# Altium PCB ELEKID_POWER.PcbDoc
Units mil, origin at the board's own origin, x right, y up, seen from the top; angles counter-clockwise.
Board outline 2420 x 1725 mil, 2 copper layers (Top Layer, Bottom Layer); 38 components, 23 nets, 111 pads, 61 vias.
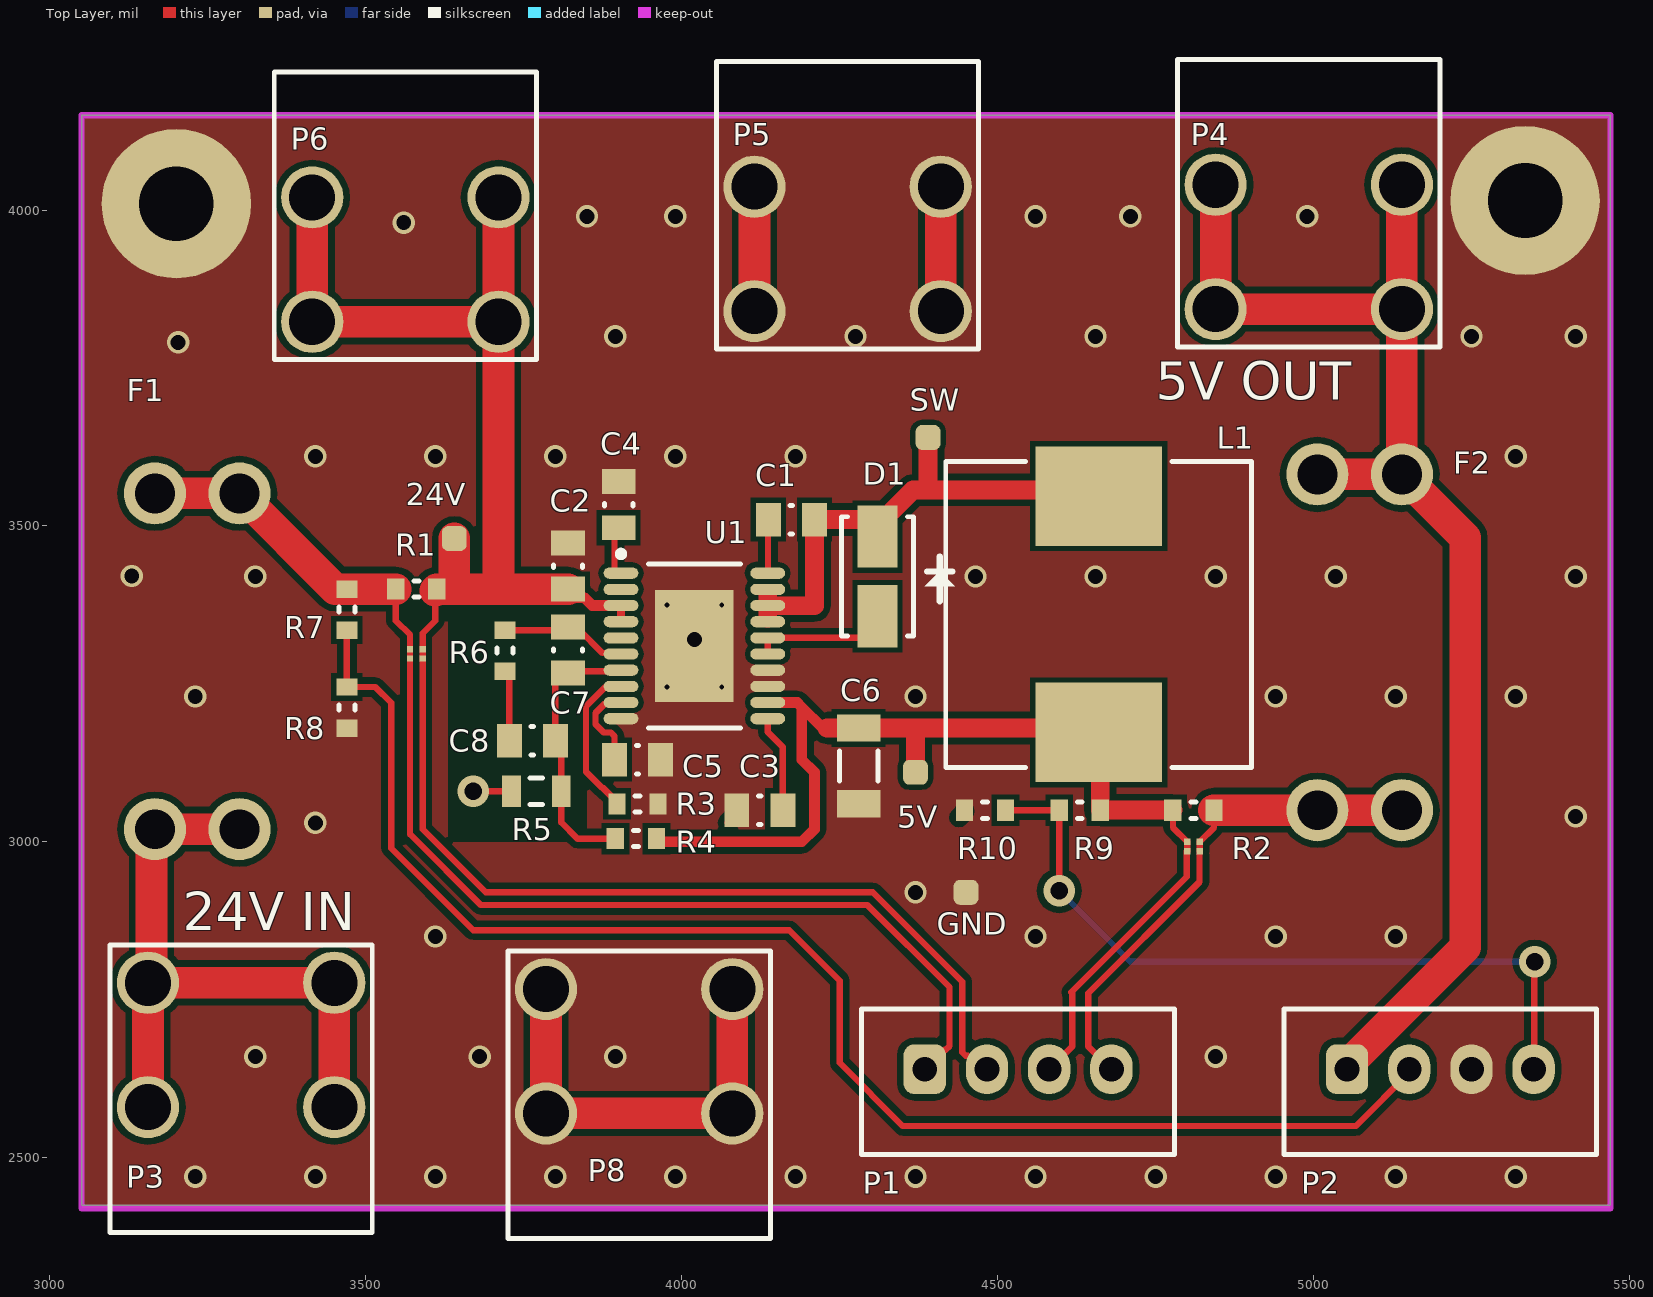
[diagram p0: Top Layer view]
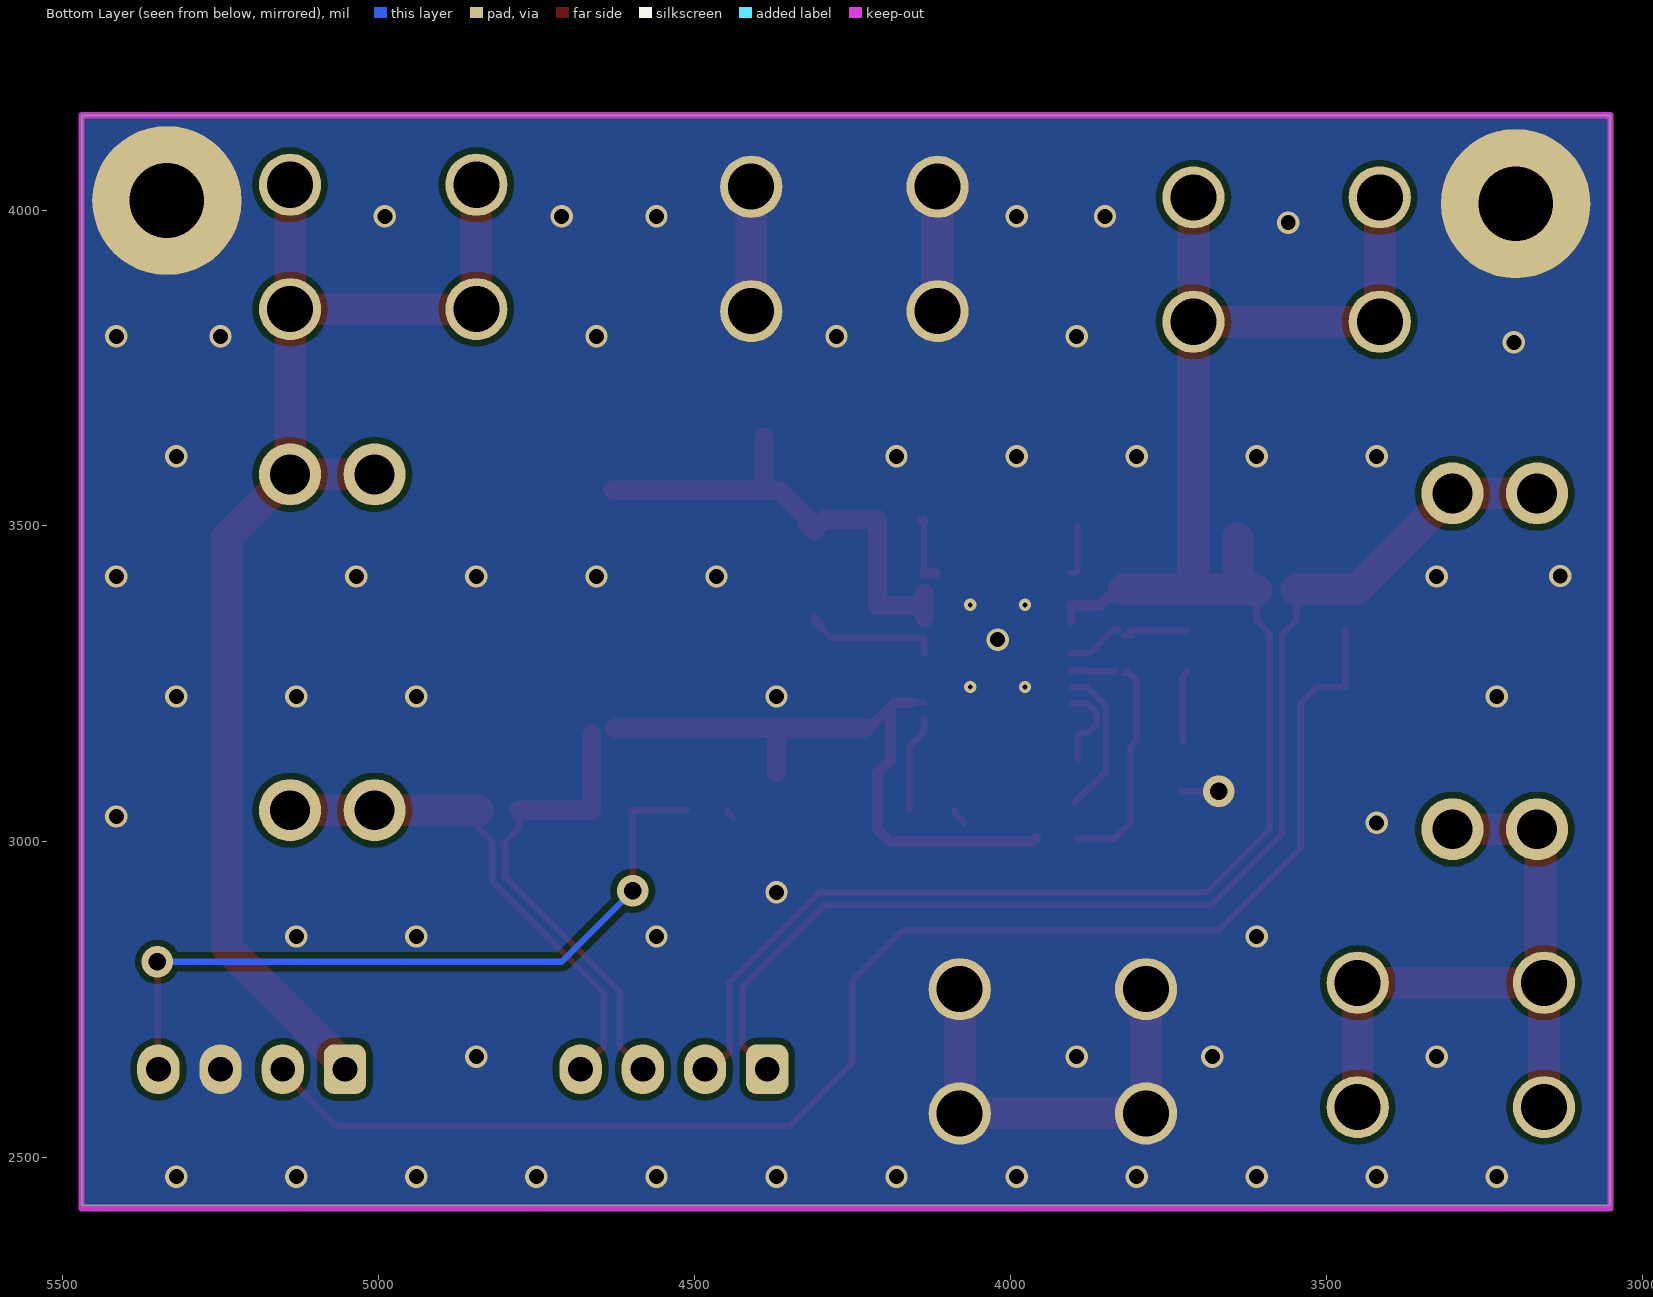
[diagram p1: Bottom Layer view, seen from below]
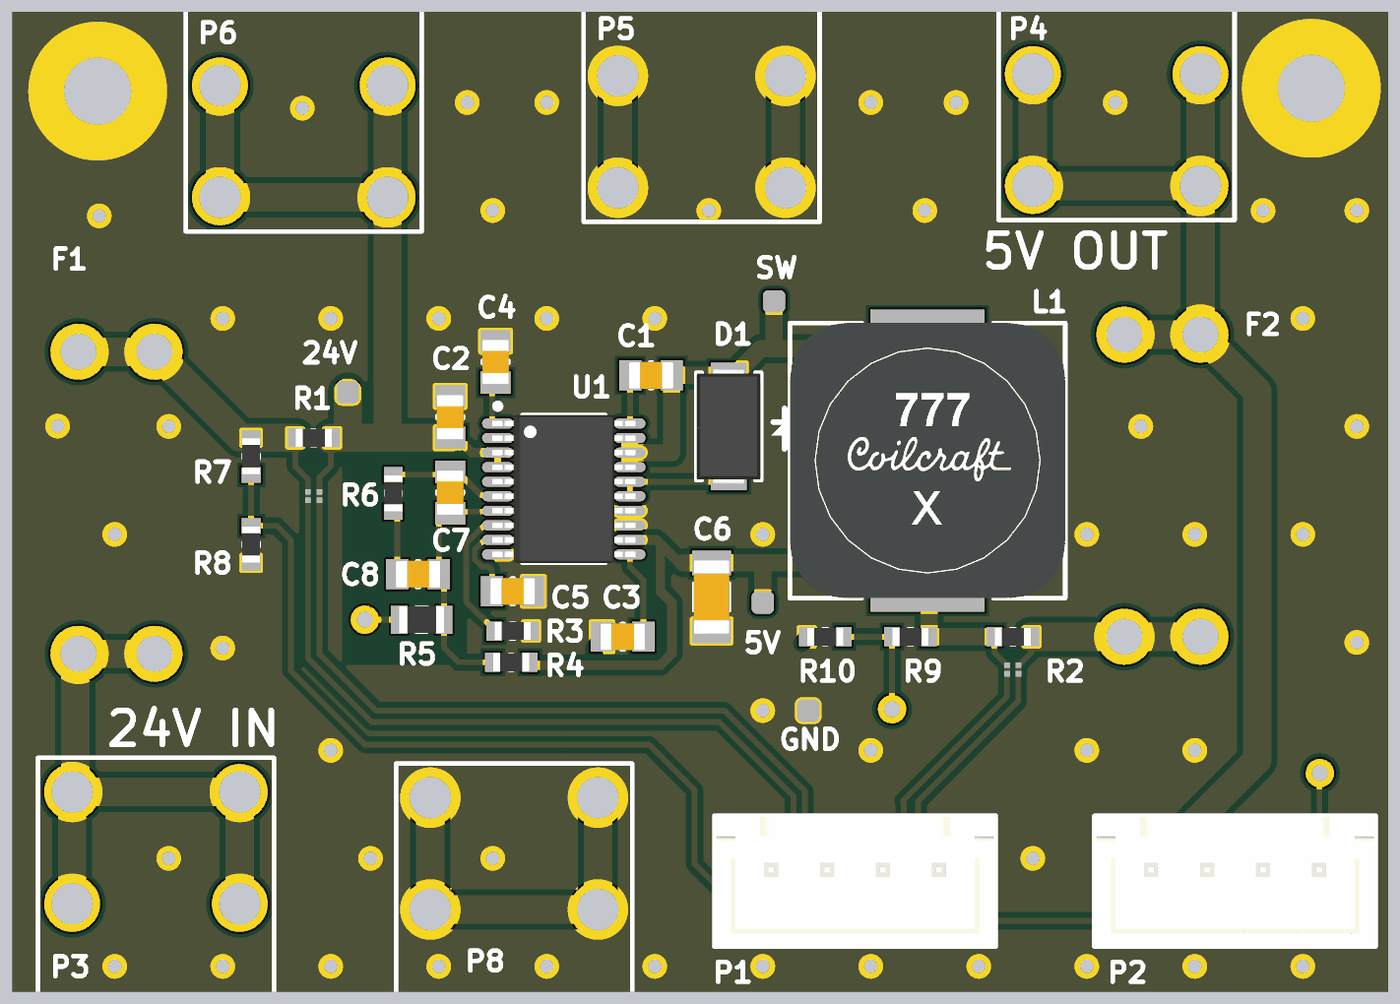
[diagram p2: 3D render of the assembled board from above, using the file's embedded part models]

## Layer stack, top to bottom
Top Solder: solder mask 0.4, Solder Resist, Dk 3.5
Top Layer: signal copper 1.4
Dielectric 1: dielectric 12.6, FR-4, Dk 4.8
Bottom Layer: signal copper 1.4
Bottom Solder: solder mask 0.4, Solder Resist, Dk 3.5

## Board outline
3050,2425 5470,2425 5470,4150 3050,4150

## Design rules (kind name [scope] priority, off if disabled: settings)
Clearance [All] p1: gap=10 ignorepadtopadclearanceinfootprint=FALSE except(0: Arc-Hole Track-Hole SMDPad-Hole THPad-Hole Via-Hole Fill-Hole Poly-Hole Region-Hole Text-Hole; 5: Arc-Arc Arc-Track Track-Track SMDPad-SMDPad; 7.87: Arc-SMDPad Track-SMDPad SMDPad-Fill SMDPad-Poly SMDPad-Region)
DiffPairsRouting [All] p1: maxlimit=10 minlimit=10 mostfreqgap=10 toplayer_minwidth=8 toplayer_maxwidth=15 toplayer_prefwidth=10 bottomlayer_minwidth=8 bottomlayer_maxwidth=15 bottomlayer_prefwidth=10 maxuncoupledlength=500
PolygonConnect PolygonConnect_10 [All vs IsNamedPolygon('GND_L02_P001')] p1: connectstyle=Direct reliefconductorwidth=10 reliefentries=4 polygonreliefangle="90 Angle" airgapwidth=10
PolygonConnect PolygonConnect_9 [All vs IsNamedPolygon('GND_L01_P004')] p2: connectstyle=Direct reliefconductorwidth=10 reliefentries=4 polygonreliefangle="90 Angle" airgapwidth=10
PolygonConnect PolygonConnect_8 [All vs IsNamedPolygon('GND_L01_P004')] p3: connectstyle=Direct reliefconductorwidth=10 reliefentries=4 polygonreliefangle="90 Angle" airgapwidth=10
PolygonConnect PolygonConnect_7 [All vs IsNamedPolygon('GND_L02_P001')] p4: connectstyle=Direct reliefconductorwidth=10 reliefentries=4 polygonreliefangle="90 Angle" airgapwidth=10
PolygonConnect PolygonConnect_6 [All vs IsNamedPolygon('GND_L01_P004')] p5: connectstyle=Direct reliefconductorwidth=10 reliefentries=4 polygonreliefangle="90 Angle" airgapwidth=10
PolygonConnect PolygonConnect_5 [All vs IsNamedPolygon('GND_L01_P004')] p6: connectstyle=Direct reliefconductorwidth=10 reliefentries=4 polygonreliefangle="90 Angle" airgapwidth=10
PolygonConnect PolygonConnect_4 [All vs IsNamedPolygon('GND_L01_P004')] p7: connectstyle=Direct reliefconductorwidth=10 reliefentries=4 polygonreliefangle="90 Angle" airgapwidth=10
PolygonConnect PolygonConnect_3 [All vs IsNamedPolygon('GND_L01_P004')] p8: connectstyle=Direct reliefconductorwidth=10 reliefentries=4 polygonreliefangle="90 Angle" airgapwidth=10
PolygonConnect PolygonConnect_2 [All vs IsNamedPolygon('GND_L01_P004')] p9: connectstyle=Direct reliefconductorwidth=10 reliefentries=4 polygonreliefangle="90 Angle" airgapwidth=10
PolygonConnect PolygonConnect_1 [All vs IsNamedPolygon('GND_L01_P004')] p10: connectstyle=Direct reliefconductorwidth=10 reliefentries=4 polygonreliefangle="90 Angle" airgapwidth=10
PolygonConnect [All] p11: connectstyle=Relief reliefconductorwidth=10 reliefentries=4 polygonreliefangle="90 Angle" airgapwidth=10
RoutingVias [All] p1: holewidth=19.68 width=39.37 viastyle="Through Hole" minholewidth=7.87 minwidth=23.62 maxholewidth=28 maxwidth=50
SilkToSolderMaskClearance [IsPad] p1: minsilkscreentomaskgap=5.91 clearancetoexposedcopper=TRUE
SolderMaskExpansion [All] p1: expansion=4 istentingtop=FALSE
Width [All] p1: maxlimit=50 minlimit=10 preferedwidth=15 toplayer_prefwidth=10 minimp=50.000000 maximp=50.000000 favimp=50.000000
28 further rules are at their usual default settings.

## Classes and differential pairs
differential pair 24V: +24V_P -24V_N
differential pair 5V: +5V_P -5V_N

## Components (designator, comment, footprint, x,y, rotation, side; value= is the part's Value field where it differs from the comment)
5V "Test Point" "Test Point" 4370,3110 r90 top (schematic designator TP2)
24V "Test Point" "Test Point" 3640,3480 r90 top (schematic designator TP1)
C1 "" "0805 - Capacitor" 4173.58,3510 r180 top value=22nF
C2 "" "0805 - Capacitor" 3820,3436.42 r270 top value=2.2uF
C3 "" "0805 - Capacitor" 4123.58,3050 r0 top value=10nF
C4 "" "0805 - Capacitor" 3900,3533.58 r270 top value=100nF
C5 "" "0805 - Capacitor" 3930,3130 r180 top value=270pF
C6 "Capacitor - Nonpolarized" "1206 - Capacitor" 4280,3120 r270 top value=100uF
C7 "" "0805 - Capacitor" 3820,3303.58 r90 top value=120pF
C8 "" "0805 - Capacitor" 3763.58,3160 r180 top value=2.7nF
D1 "Diode - Schottky" "SMA - DIODE" 4310,3420 r90 top
F1 "Fuse" 3557-2 3166.14,3551.5 r270 top
F2 "Fuse" 3557-2 5006.14,3581.5 r270 top
GND "Test Point" "Test Point" 4450,2920 r90 top (schematic designator TP4)
L1 "Inductor" "MSS1210 - INDUCTOR" 4660,3360 r270 top value=33uH
NT1 "NetTie" "Net Tie" 3570,3305 r0 top net-tie
NT2 "NetTie" "Net Tie" 3590,3305 r0 top net-tie
NT3 "NetTie" "Net Tie" 4800,3000 r0 top net-tie
NT4 "NetTie" "Net Tie" 4820,3000 r0 top net-tie
P1 "1x4 Header" B4B-XH 4384.72,2640 r0 top
P2 "1x4 Header" B4B-XH 5053.15,2640 r0 top
P3 "7760" 7760 3155.12,2776.85 r270 top
P4 "7760" 7760 5140,3843.15 r90 top
P5 "7760" 7760 4410,3840 r90 top
P6 "7760" 7760 3710,3823.15 r90 top
P8 "7760" 7760 3785.12,2766.85 r270 top
R1 "Resistor" "0603 - Resistor" 3580,3400 r180 top
R2 "Resistor" "0603 - Resistor" 4810,3050 r0 top
R3 "" "0603 - Resistor" 3930,3060 r180 top value=20.5k
R4 "" "0603 - Resistor" 3927.52,3005.04 r0 top value=3.09k
R5 "" "0805 - Resistor" 3770,3080 r0 top value=1k
R6 "" "0603 - Resistor" 3720,3302.48 r90 top value=19.1k
R7 "Resistor" "0603 - Resistor" 3470,3367.52 r90 top value=75k
R8 "Resistor" "0603 - Resistor" 3470,3212.48 r270 top value=10k
R9 "Resistor" "0603 - Resistor" 4630,3050 r0 top value=10k
R10 "Resistor" "0603 - Resistor" 4480,3050 r0 top value=10k
SW "Test Point" "Test Point" 4390,3640 r90 top (schematic designator TP3)
U1 "LM5005" LM5005 4020,3310 r0 top

## Footprints (in the part's own frame and the unit in brackets; to place one, negate y for a bottom-side part, rotate by r counter-clockwise, add the part's x,y. Pads: shape width x height; smd on the part's side, far side on the other; paste and mask are expansions set on the pad)
"0603 - Resistor" [mm] "0603 Chip Resistor - IPC Medium Density"
  rect 0.7x0.85 smd: 1(-0.825,0) 2(0.825,0)
  silkscreen extent -0.1,-0.33 0.1,0.33, body extent -0.8,-0.4 0.8,0.4, height 0.45
"0805 - Capacitor" [mm] "0805 Chip Capacitor - IPC Medium Density"
  rect 1x1.35 smd: 1(-0.925,0) 2(0.925,0)
  silkscreen extent -0.05,-0.58 0.05,0.58, body extent -1,-0.6 1,0.6, height 1.2
"0805 - Resistor" [mm] "0805 Chip Resistor - IPC Medium Density"
  rect 0.75x1.25 smd: 1(-1,0) 2(1,0)
  silkscreen extent -0.25,-0.53 0.25,0.53, body extent -1,-0.6 1,0.6, height 0.5
"1206 - Capacitor" [mm] "1206 Chip Capacitor - IPC Medium Density"
  rect 1.1x1.75 smd: 1(-1.525,0) 2(1.525,0)
  silkscreen extent -0.6,-0.77 0.6,0.77, body extent -1.65,-0.8 1.65,0.8, height 1.6
3557-2 [mm] "Fuse Holder"
  round 2.5 hole 1.6: 1(0,3.4) 1(0,0) 2(13.5,0) 2(13.5,3.4)
7760 [mm] "Screw-On Connector"
  round 2.5 hole 1.85: 1(0,7.49) 1(0,0) 1(5,7.49) 1(5,0)
  silkscreen extent -1.52,-1.52 10.03,9.02
B4B-XH [mm] "JST 4-Pin"
  rrect50% 1.7x2 hole 1: 1(0,0)
  oval 1.7x2 hole 1: 2(2.5,0) 3(5,0) 4(7.5,0)
  silkscreen extent -2.54,-3.43 10.03,2.41, body extent -2.45,-3.4 9.95,2.35, height 7
LM5005 [mm] "20-PowerTSSOP (0.173\"\", 4.40mm Width)"
  oval 1.4x0.45 smd: 1(-2.95,2.925) 2(-2.95,2.275) 3(-2.95,1.625) 4(-2.95,0.975) 5(-2.95,0.325) 6(-2.95,-0.325) 7(-2.95,-0.975) 8(-2.95,-1.625) 9(-2.95,-2.275) 10(-2.95,-2.925) 11(2.95,-2.925) 12(2.95,-2.275) 13(2.95,-1.625) 14(2.95,-0.975) 15(2.95,-0.325) 16(2.95,0.325) 17(2.95,0.975) 18(2.95,1.625) 19(2.95,2.275) 20(2.95,2.925)
  rect 3.15x4.5 smd: 21(0,0)
  silkscreen extent -3.07,-3.3 1.85,3.82, body extent -3.2,-3.3 3.2,3.3, height 1.1
"MSS1210 - INDUCTOR" [mm] "Precision Wire Wound Inductor, 2-Leads, Body 12.00x12.00mm, IPC Medium Density"
  rect 4x5.1 smd: 1(-4.75,0) 2(4.75,0)
  silkscreen extent -6.15,-6.15 6.15,6.15, body extent -6.15,-6.15 6.15,6.15, height 10.16
"Net Tie" [mil] "General Net TIe"
  rect 10x10 smd mask+0: 1(0,0) 2(0,-15)
  Top Layer lines w10: 0,-15 0,0
"SMA - DIODE" [mm] "Molded Diode, 2-Leads, Body 4.38x2.63mm, IPC Medium Density"
  rect 2.5x1.6 smd: 1(-1.6,0) 2(1.6,0)
  silkscreen extent -2.4,-3.1 2.4,1.45, body extent -2.6,-1.43 2.6,1.43, height 2.95
"Test Point" [mm] "Test Point"
  rrect50% 1x1 smd: 0(0,0)

## Part data
C1: library part "Capacitor - Nonpolarized", "Nonpolarized Capacitor", Supplier Part Number=311-3547-1-ND, Supplier 1=Digi-Key
C2: library part "Capacitor - Nonpolarized", "Nonpolarized Capacitor", Supplier Part Number=311-3420-1-ND, Supplier 1=Digi-Key
C3: library part "Capacitor - Nonpolarized", "Nonpolarized Capacitor", Supplier Part Number=311-1136-1-ND, Supplier 1=Digi-Key
C4: library part "Capacitor - Nonpolarized", "Nonpolarized Capacitor", Supplier Part Number=311-1140-1-ND, Supplier 1=Digi-Key
C5: library part "Capacitor - Nonpolarized", "Nonpolarized Capacitor", Supplier Part Number=311-1191-1-ND, Supplier 1=Digi-Key
C6: "Nonpolarized Capacitor", Supplier Part Number=445-6007-1-ND, Supplier=Digi-Key
C7: library part "Capacitor - Nonpolarized", "Nonpolarized Capacitor", Supplier Part Number=311-1112-1-ND, Supplier 1=Digi-Key
C8: library part "Capacitor - Nonpolarized", "Nonpolarized Capacitor", Supplier Part Number=311-1130-1-ND, Supplier 1=Digi-Key
D1: "Schottky Rectifier", Supplier Part Number=1655-10TQ045SCT-ND, ComponentLink1Description="Manufacturer Link", ComponentLink1URL=http://www.irf.com/, ComponentLink2Description=Datasheet, ComponentLink2URL=http://www.irf.com/product-info/datasheets/data/10tq.pdf, Supplier 1=Digi-Key
F1 F2: Supplier Part Number=36-3557-2-ND
  F1: Supplier=Digikey
L1: Supplier Part Number=994-MSS1210-333MEB, Supplier=Mouser, Supplier 1=Mouser
NT1 NT2 NT3 NT4: library part "Net Tie"
P1 P2: "1x4 Pin Header"
P3 P4 P5 P6 P8: Supplier Part Number=36-7760-ND
  P3 P5: Supplier=Digikey
R1 R2: Supplier Part Number=P15CECT-ND, Supplier=Digikey
R3: library part Resistor, "Resistor", Supplier Part Number=311-20.5KHRCT-ND, Supplier 1=Digi-Key
R4: library part Resistor, "Resistor", Supplier Part Number=311-3.09KHRCT-ND, Supplier 1=Digi-Key
R5: library part Resistor, "Resistor", Supplier Part Number=311-1.00KHRCT-ND, Supplier 1=Digi-Key
R6: library part Resistor, "Resistor", Supplier Part Number=311-19.1KHRCT-ND, Supplier 1=Digi-Key
R7: Supplier Part Number=P75KBYCT-ND, Supplier 1=Digi-Key, Supplier Part Number 1=P75KBYCT-ND
R8 R9 R10: Supplier Part Number=311-10.0KHRCT-ND
  R8: Supplier=Digikey
U1: "7V to 75V 2.5A, Buck Converter", Manufacturer="Texas Instruments", Manufacturer Part Number=LM5005MHX/NOPB, Supplier Part Number=LM5005MHX/NOPBCT-ND, Datasheet=https://www.ti.com/lit/ds/symlink/lm5005.pdf?HQS=TI-null-null-digikeymode-df-pf-null-wwe&ts=1606456124909, Supplier=Digi-Key, Supplier 1=Digi-Key

## Free pads (board coordinates)
  round 236.22 hole 118.11: 1(3200,4010) 2(5335,4015)

## Via types
v1: diameter 35.43, hole 23.62, Top Layer to Bottom Layer, 54 vias
v2: diameter 19.68, hole 7.87, Top Layer to Bottom Layer, 4 vias
v3: diameter 50, hole 28, Top Layer to Bottom Layer, 3 vias

## Nets (pads, with @x,y where several pads share a name; then routed paths per layer and width w, separated by ;. In a path a pad name is that pad's centre, name@x,y a point inside that pad or via, vN(x,y) a via of type N, cw(c..) or ccw(c..) an arc to the next point about the centre after c; other vN are vias at no path point)
"5V VSENSE": P2.4 R9.1 R10.2 | length 1197.7
  Top Layer w10: R10.2 R9.1 v3(4597.52,2922.48) ; P2.4@5337.53,2650.89 P2.4 5349.21,2640.79 5349.21,2809.21 v3(5350,2810)
  Bottom Layer w10: v3(4597.52,2922.48) 4710,2810 v3(5350,2810)
5V_N: NT4.2 P1.4 | length 428.7
  Top Layer w10: P1.4@4679.2,2640 4643.29,2675.91 4643.29,2760 4819.55,2936.26 4819.55,2975 NT4.2@4819.55,2980
  Top Layer w15: P1.4@4679.2,2640 P1.4
5V_P: NT3.2 P1.3 | length 434.8
  Top Layer w10: P1.3@4582.38,2640 4618.29,2675.91 4618.29,2760 ; 4616.64,2761.64 4799.55,2944.54 NT3.2@4799.55,2985
  Top Layer w15: P1.3 P1.3@4582.38,2640
"24V VSENSE": P2.2 R7.1 R8.1 | length 2309.3
  Top Layer w10: R7.1 R8.1 3515.04,3244.96 3540,3220 3540,2990 3670,2860 4170,2860 4250,2780 4250,2650 4350,2550 5066.99,2550 P2.2@5154.28,2637.29
24V_N: NT2.2 P1.2 | length 1385.8
  Top Layer w10: NT2.2 3590,3020 3690,2920 4302.22,2920 4443.94,2778.28 4443.94,2666.95 4449.79,2661.09 4452.56,2661.09 4473.65,2640 P1.2
24V_P: NT1.2 P1.1 | length 1380
  Top Layer w10: NT1.2 3570,3011.72 3681.72,2900 4293.94,2900 4423.94,2770 4423.94,2676.75 4418.08,2670.89 4416.06,2670.89 4385.17,2640 P1.1
24V_PROT: 24V.0 C2.2 NT2.1 P6.1 R1.1 U1.3 U1.4 | length 1635.4
  Top Layer w10: NT2.1 3590,3330 3610,3350 R1.1@3610,3397.52
  Top Layer w12: C2.2 C2.2@3833.69,3386.31 ; U1.4 U1.3
  Top Layer w17: C2.2@3833.69,3386.31 3845.96,3386.31 3858.3,3373.98 U1.3
  Top Layer w50: P6.1@3409.85,3817.88 P6.1@3415.12,3823.15 ; P6.1@3415.12,4020 P6.1@3415.12,3823.15 ; R1.1@3610,3397.52 R1.1 3640,3400 ; 24V.0 3640,3400 ; P6.1@3710,4020 P6.1@3710,3823.15 ; C2.2 3720,3400 ; P6.1@3415.12,3823.15 P6.1@3710,3823.15 ; 3640,3400 3720,3400 ; P6.1@3710,3823.15 3710,3410 3720,3400
+5V: F2.1 P2.1 P4.1 | length 2144.4
  Top Layer w50: P4.1@4845.12,4040 4845.12,3843.15 P4.1@5140,3843.15 ; F2.1@5006.14,3581.5 F2.1@5140,3581.5 ; P2.1 5053.15,2645.91 5240,2832.76 5240,3481.5 F2.1@5140,3581.5 ; P4.1@5140,4040 P4.1@5140,3843.15 ; F2.1@5140,3581.5 P4.1@5140,3843.15
+24V: F1.2 P3.1 | length 1070.2
  Top Layer w50: P3.1@3155.12,2580 P3.1@3155.12,2776.85 ; F1.2@3300,3020 3166.14,3020 3160.63,3014.49 3160.63,2782.36 P3.1@3155.12,2776.85 ; P3.1@3450,2580 3450,2776.85 P3.1@3155.12,2776.85
GND: C2.1 C3.1 C4.1 C5.1 C6.2 GND.0 P2.3 P5.1 P8.1 pad.1 pad.2 R3.1 R5.1 R8.2 R10.1 U1.10 U1.13 U1.14 U1.21 | length 1184.4
  Top Layer w10: v3(3670,3080) R5.1 ; C3.1@4072.48,3030 4087.17,3044.69 C3.1 ; R10.1@4438.74,3038.27 4447.52,3047.05 R10.1
  Top Layer w50: P8.1@3785.12,2766.85 3785.12,2570 4080,2570 P8.1@4080,2766.85 ; P5.1@4115.12,3840 P5.1@4115.12,4036.85 ; P5.1@4410,3840 P5.1@4410,4036.85
  other v1: 3230,2470 3420,2470 3610,2470 3800,2470 3990,2470 4180,2470 4370,2470 4560,2470 4750,2470 4940,2470 5130,2470 5320,2470 3325,2660 3680,2660 3895,2660 4845,2660 3610,2850 4560,2850 4940,2850 5130,2850 4370,2920 3420,3030 5415,3040 3230,3230 4370,3230 4940,3230 5130,3230 5320,3230 4020,3320 3325,3420 4465,3420 4655,3420 4845,3420 5035,3420 5415,3420 3129.43,3420.64 3420,3610 3610,3610 3800,3610 3990,3610 4180,3610 5320,3610 3202.77,3790.47 3895,3800 4275,3800 4655,3800 5250,3800 5415,3800 3560,3980 3850,3990 3990,3990 4560,3990 4710,3990 4990,3990
  other v2: 3976.69,3245.04 4063.31,3245.04 3976.69,3374.96 4063.31,3374.96
NetC1_1: C1.1 D1.2 L1.1 SW.0 U1.17 U1.18 U1.19 | length 801.8
  Top Layer w10: D1.2 D1.2@4310,3491.85
  Top Layer w30: U1.17@4136.14,3354.53 U1.18 ; U1.19@4136.14,3393.43 U1.18 ; SW.0 4390,3557.01 ; L1.1@4630,3557.01 4390,3557.01 ; U1.18 4136.48,3373.64 4210,3373.64 C1.1 4293.5,3510 4310,3493.5 4310,3491.85 4320,3501.85 4320,3510.71 4366.3,3557.01 4390,3557.01
NetC1_2: C1.2 U1.20 | length 107.4
  Top Layer w10: U1.20@4136.65,3425.67 C1.2@4136.65,3509.49
  Top Layer w15: U1.20@4117.44,3425.16 U1.20 U1.20@4136.65,3425.67 ; C1.2@4136.65,3509.49 C1.2 C1.2@4139.58,3507.59
NetC3_2: C3.2 U1.11 | length 154.7
  Top Layer w10: U1.11 4136.14,3173.86 4160,3150 C3.2
NetC4_2: C4.2 U1.1 | length 83
  Top Layer w10: C4.2@3893.58,3500 3893.58,3428.72 3897.15,3425.16 U1.1
NetC5_2: C5.2 U1.9 | length 138.3
  Top Layer w10: C5.2 3893.58,3167.25 3887.72,3173.11 3876.16,3173.11 3863.42,3185.84 3863.42,3203.85 3878.54,3218.96 U1.9@3902.38,3218.96
NetC6_1: 5V.0 C6.1 L1.2 NT3.1 R2.1 R4.2 R9.2 U1.12 | length 1337.8
  Top Layer w10: U1.12 U1.12@4156.93,3220.43 ; 4223.11,3180 4230,3180 ; L1.2 L1.2@4662.48,3170.51 ; R2.1 4777.52,3022.48 NT3.1
  Top Layer w17: R4.2 3965.04,3000 4190,3000 4210,3020 4210,3110 4190,3130 4190,3213.11 ; U1.12@4156.93,3220.43 4182.68,3220.43 4190,3213.11 ; 4223.11,3180 4190,3213.11
  Top Layer w30: 4230,3180 4270,3180 4370,3180 ; 5V.0 4370,3180 ; L1.2@4627.01,3180 4370,3180 ; L1.2@4662.48,3170.51 R9.2 R2.1
NetC7_1: C7.1 C8.1 R4.1 R5.2 U1.7 | length 422.2
  Top Layer w10: C7.1@3814.69,3267.16 C7.1 ; C7.1@3814.69,3270 3800,3255.31 C8.1 3809.37,3150.63 R5.2 3809.37,3030.63 3834.96,3005.04 R4.1 ; C7.1@3833.21,3270 3881.45,3270 3883.07,3271.62 U1.7
NetC7_2: C7.2 R6.2 U1.6 | length 210
  Top Layer w10: R6.2 C7.2@3807.16,3334.96 ; C7.2@3807.16,3332.12 3812.12,3332.12 3807.16,3327.16 3820,3327.16 C7.2@3812.12,3327.16 ; C7.2@3830,3336.42 3836.89,3336.42 3874.63,3298.68 3902.38,3298.68 U1.6
NetC8_2: C8.2 R6.1 | length 113
  Top Layer w10: R6.1 3727.16,3262.84 C8.2
NetD1_1: D1.1 U1.15 U1.16 | length 236.1
  Top Layer w10: U1.15 U1.16 4283.5,3322.8 4310,3349.29 D1.1 D1.1@4297.32,3344.33
NetF1_1: F1.1 NT1.1 R1.2 R7.2 | length 548.4
  Top Layer w10: R1.2 3547.52,3350 3570,3327.52 NT1.1
  Top Layer w50: F1.1@3166.14,3551.5 3300,3551.5 3451.5,3400 R7.2 R1.2
NetF2_2: F2.2 NT4.1 R2.2 | length 356.8
  Top Layer w10: NT4.1 4842.48,3022.48 R2.2
  Top Layer w50: R2.2 5006.14,3050 F2.2@5140,3050
NetR3_2: R3.2 U1.8 | length 242
  Top Layer w10: R3.2 3897.52,3062.95 3874.6,3085.87 3873.24,3085.87 3848.42,3110.69 3848.42,3214.44 3878.54,3244.55 U1.8@3902.38,3244.55
pads on no net: U1.2 U1.5

## Polygon pours and split planes (outlines as drawn)
GND on Bottom Layer "GND_L02_P001" (solid, pour order 1): 3050,4150 5470,4150 5470,2420 3050,2420
GND on Top Layer "GND_L01_P004" (solid, pour order 4): 3050,4150 5470,4150 5470,2420 3050,2420

## Keep-outs
Keep-Out Layer:
  lines w10: 3050,2420 3050,4150 5470,4150 5470,2420 3050,2420

## Other copper
Top Layer:
  pour cut-out: 3850,3370 3850,3000 3630,3000 3630,3370

## Silkscreen, mask and mechanical layers (free items; w line width, h text height)
Top Overlay:
  text "5V OUT" at 4750,3700 h60
  text "24V IN" at 3210,2860 h60